# Altium PCB LHR Encoder Board.PcbDoc
Units mil, origin at the board's own origin, x right, y up, seen from the top; angles counter-clockwise.
Board outline 2000 x 2000 mil, 2 copper layers (Top Layer, Bottom Layer), stack 62.205 mil thick; 11 components, 14 nets, 54 pads, 7 vias.
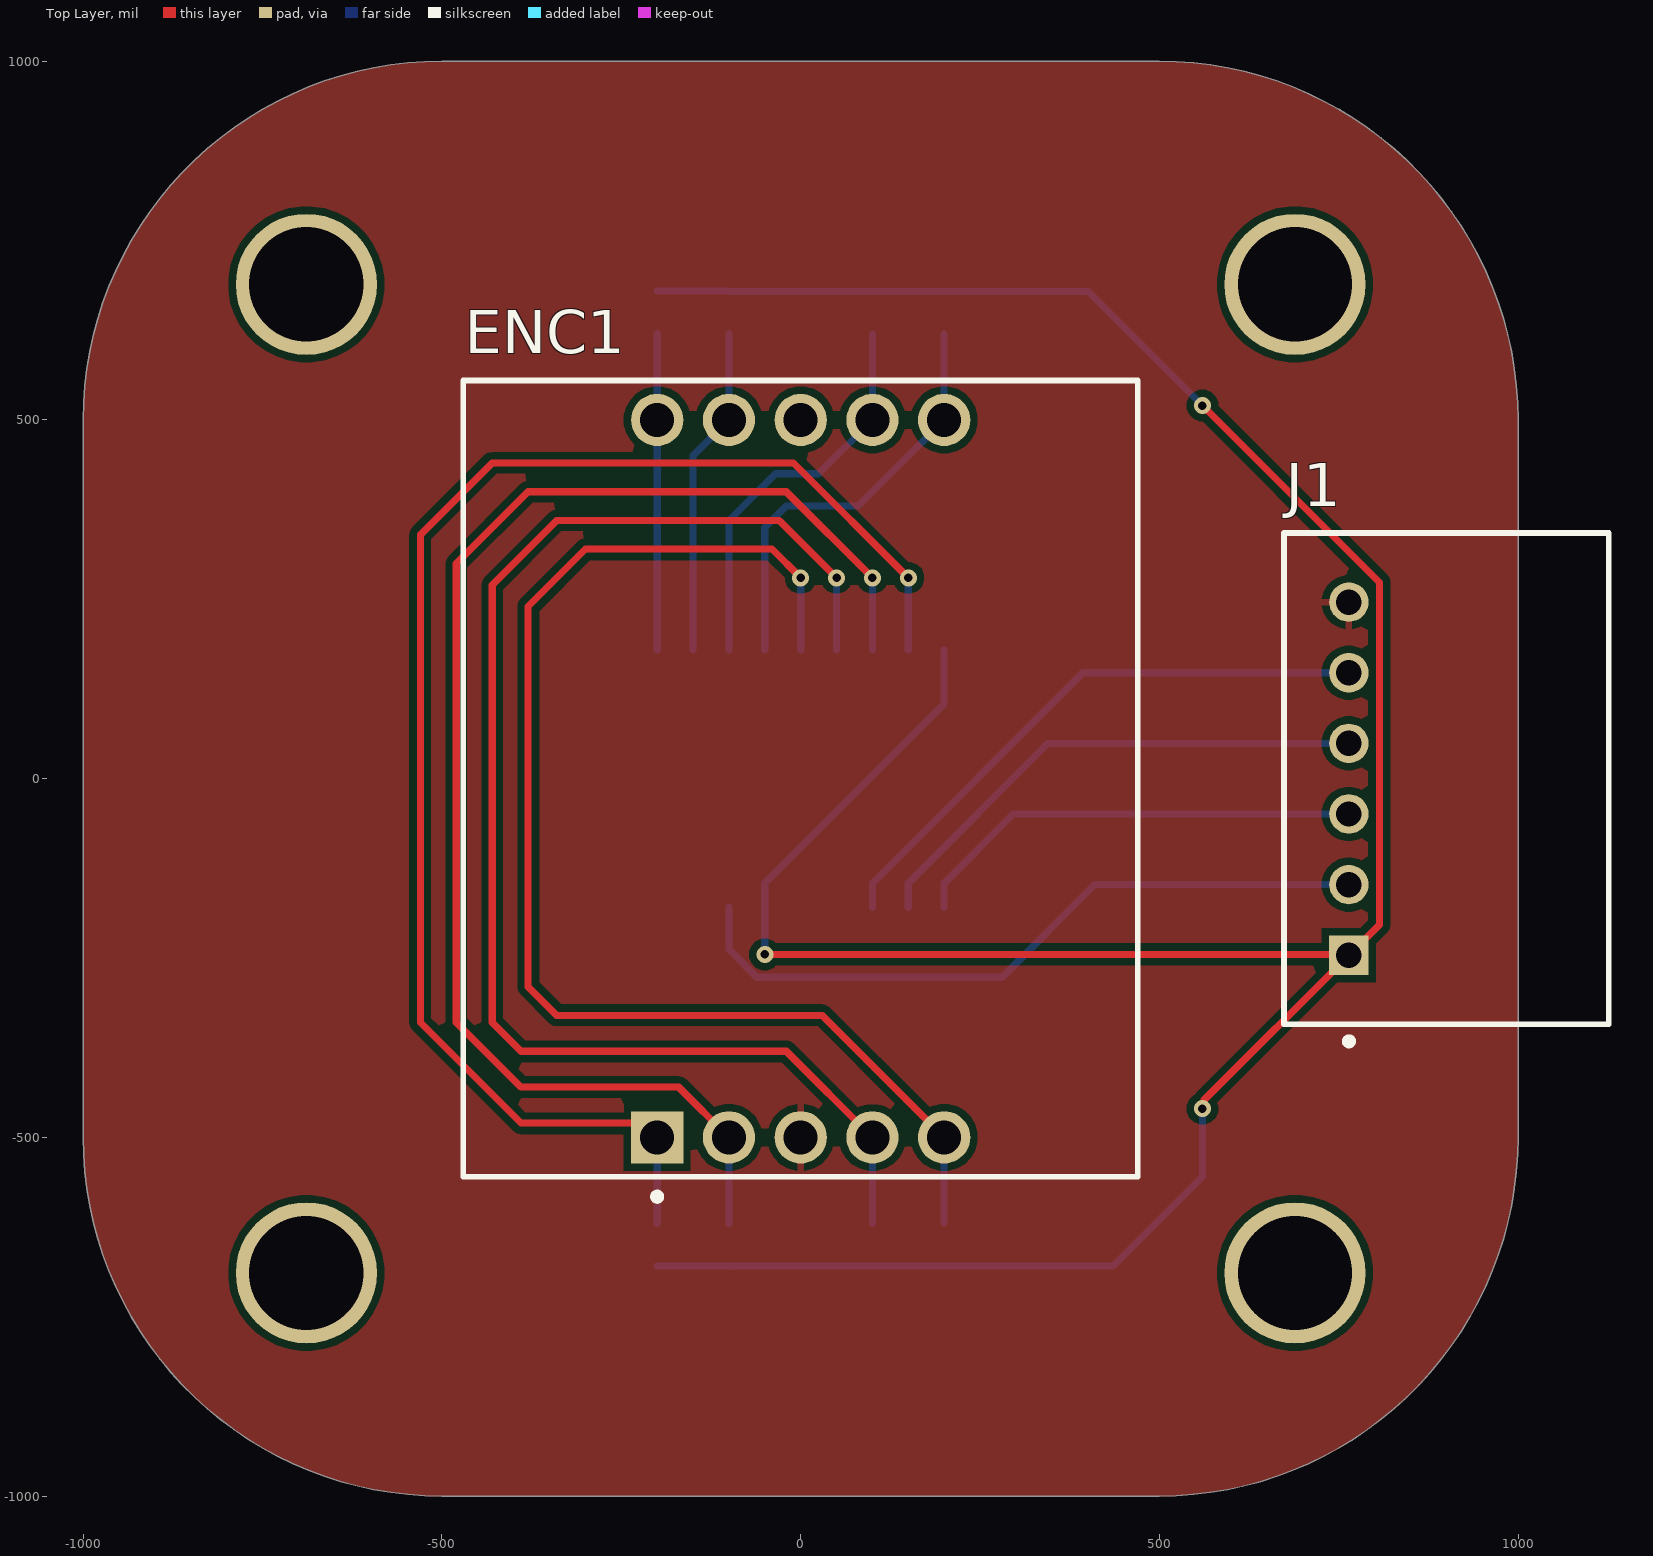
[diagram p0: Top Layer view]
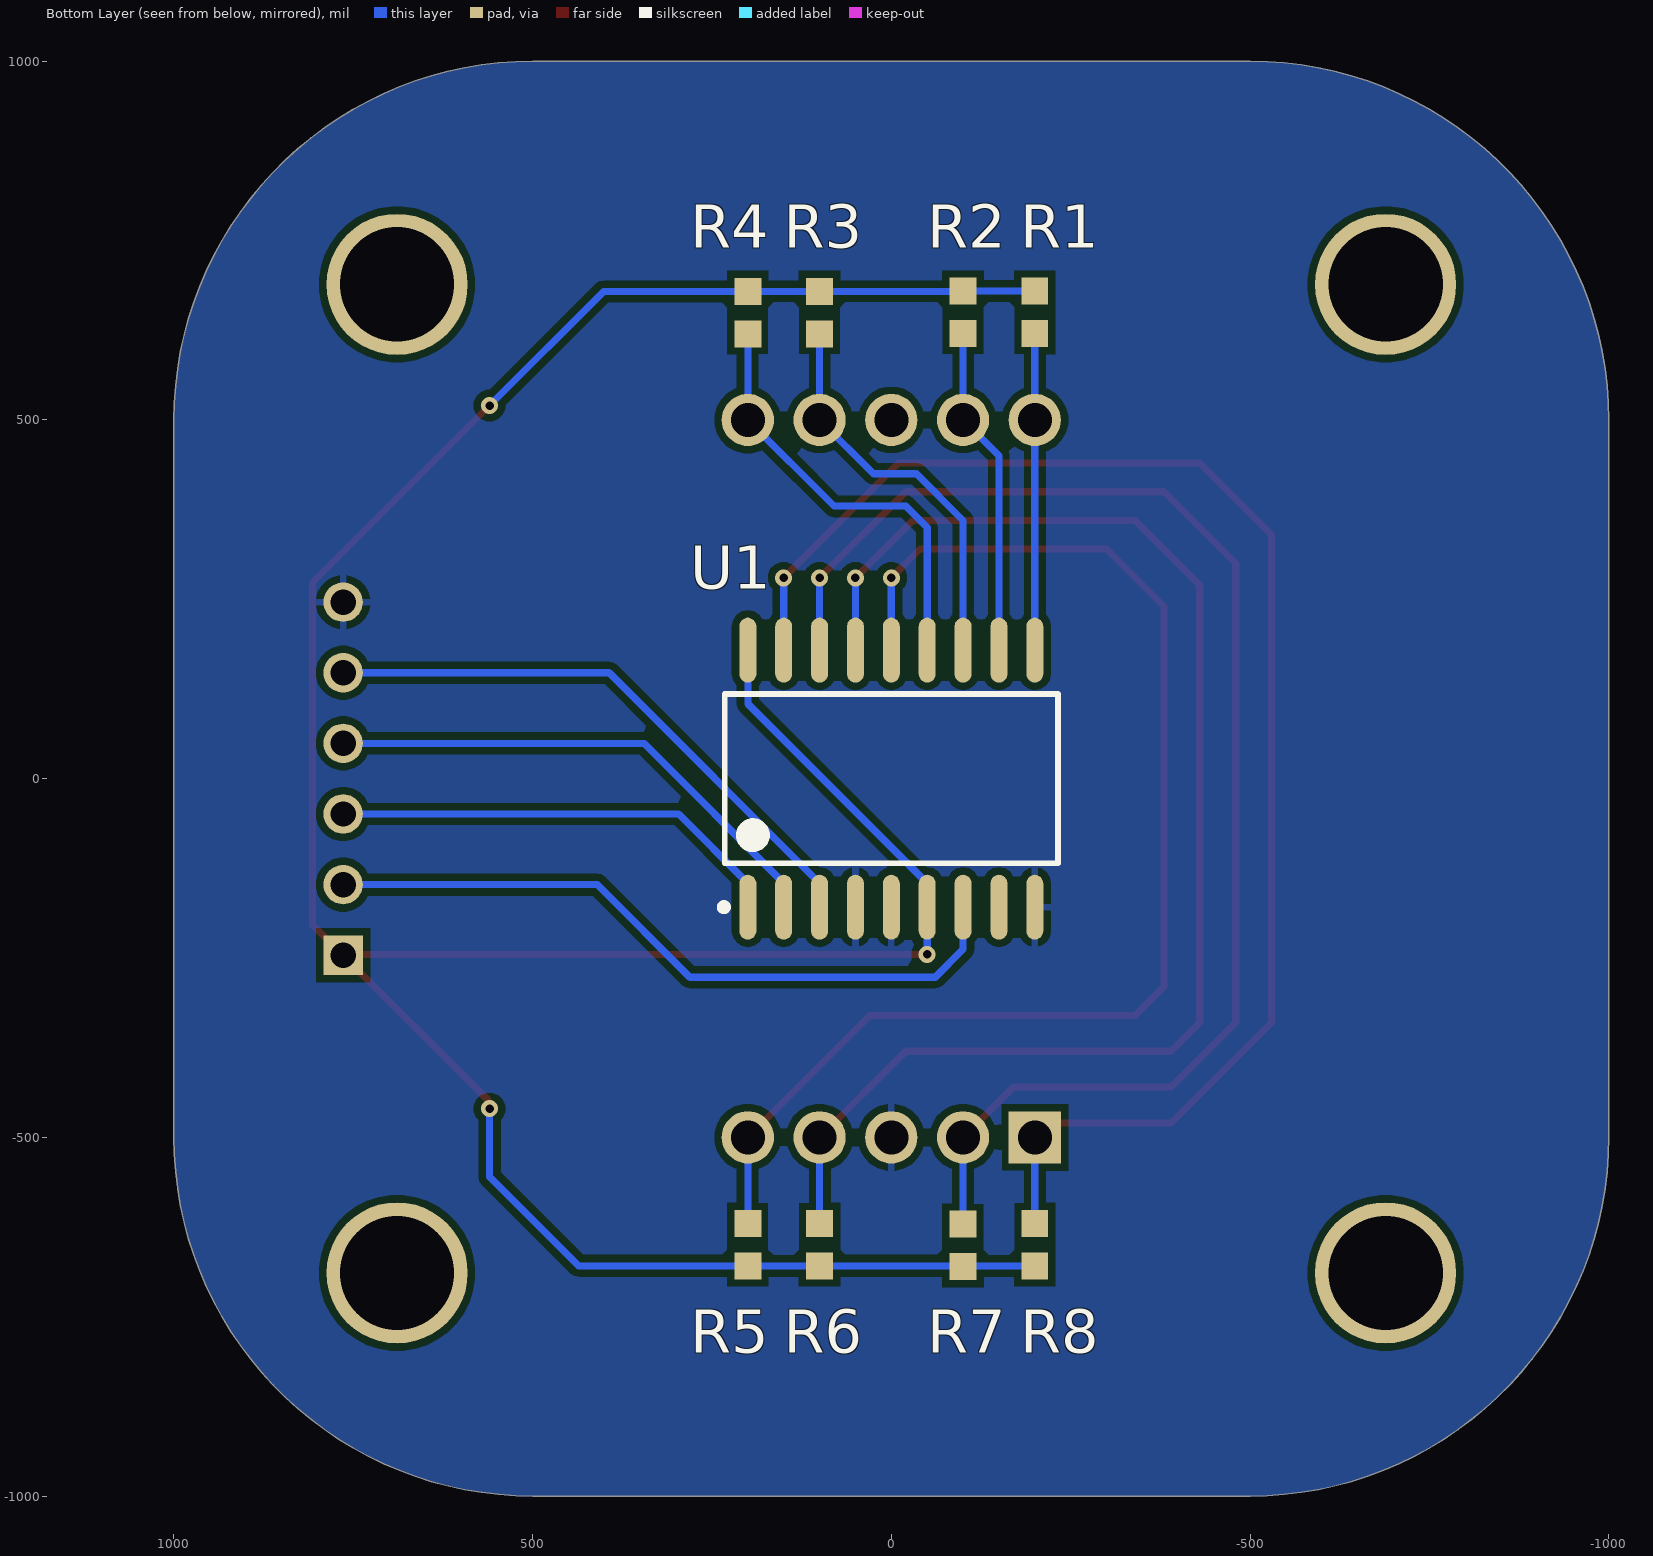
[diagram p1: Bottom Layer view, seen from below]
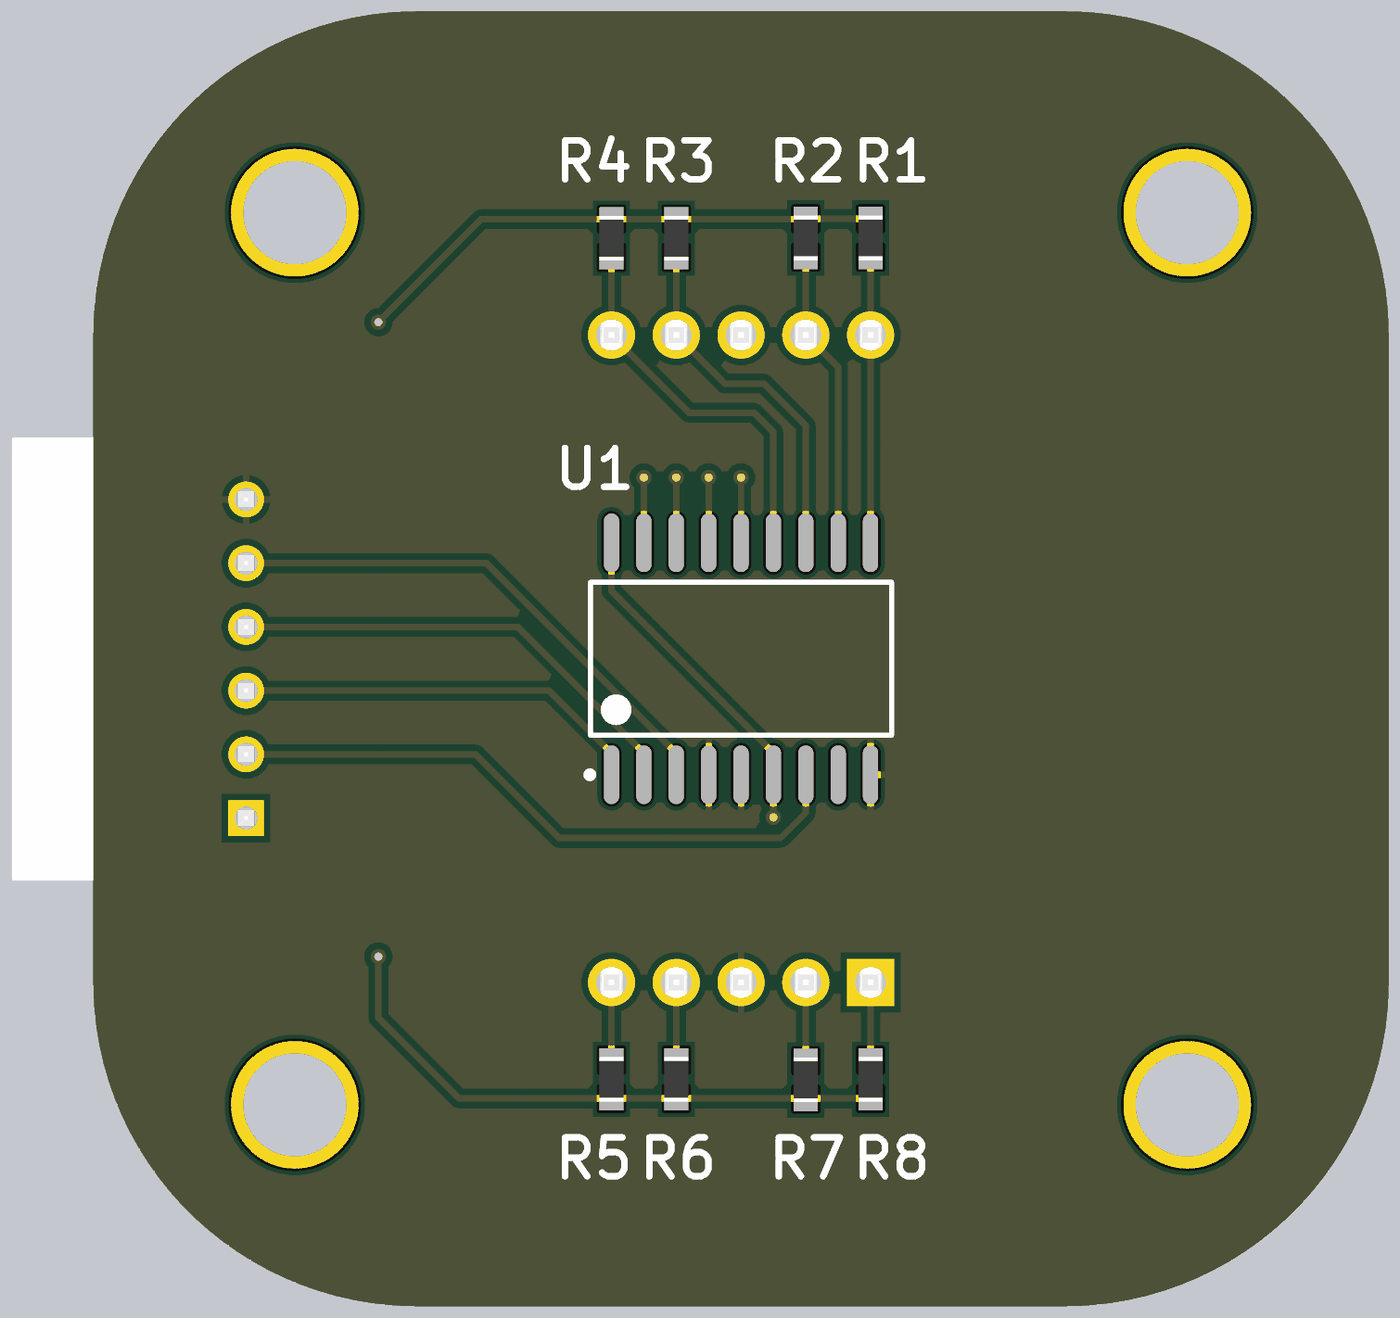
[diagram p2: 3D render of the assembled board from below, using the file's embedded part models]

## Layer stack, top to bottom
Top Solder: solder mask 0.4, Solder Resist, Dk 3.5
Top Layer: signal copper 1.378
Dielectric 1: dielectric 59.4488, FR-4, Dk 4.8
Bottom Layer: signal copper 1.378
Bottom Solder: solder mask 0.4, Solder Resist, Dk 3.5

## Board outline
-1000,-500 -1000,500 cw(c-500,500) -500,1000 500,1000 cw(c500,500) 1000,500 1000,-500 cw(c500,-500) 500,-1000 -500,-1000 cw(c-500,-500)

## Design rules (kind name [scope] priority, off if disabled: settings)
Clearance [All] p1: gap=10 ignorepadtopadclearanceinfootprint=FALSE
HoleSize [All] p1: absolutevalues=TRUE maxlimit=200 minlimit=1 maxpercent=80.000 minpercent=20.000
PolygonConnect [All] p1: connectstyle=Relief reliefconductorwidth=10 reliefentries=4 polygonreliefangle="90 Angle" airgapwidth=10
RoutingVias [All] p1: holewidth=28 width=50 viastyle="Through Hole" minholewidth=28 minwidth=50 maxholewidth=28 maxwidth=50
SolderMaskExpansion [All] p1: expansion=4 istentingtop=FALSE
SupplyNets "Schematic Supply Nets_1" [InNet('VDD')] p1: voltage=0.000
SupplyNets "Schematic Supply Nets" [InNet('GND')] p2: voltage=0.000
Width [All] p1: maxlimit=10 minlimit=10 preferedwidth=10
29 further rules are at their usual default settings.

## Components (designator, comment, footprint, x,y, rotation, side; value= is the part's Value field where it differs from the comment)
ENC1 "EAW0J-B24-AE0128L" FP-EAW0J-B24-AE0128L-MFG 0,0 r0 top
J1 "S6B-XH-A (LF)(SN)" FP-S6B-XH-A_LF_SN-MFG 900,0 r270 top
R1 "4.7k" RESC1608X55X30NL15T15 -200,650 r90 bottom
R2 "4.7k" RESC1608X55X30NL15T15 -100,650 r90 bottom
R3 "4.7k" RESC1608X55X30NL15T15 100,649.53 r90 bottom
R4 "4.7k" RESC1608X55X30NL15T15 200,649.53 r90 bottom
R5 "4.7k" RESC1608X55X30NL15T15 200,-649.53 r270 bottom
R6 "4.7k" RESC1608X55X30NL15T15 100,-649.53 r270 bottom
R7 "4.7k" RESC1608X55X30NL15T15 -100,-650.47 r270 bottom
R8 "4.7k" RESC1608X55X30NL15T15 -200,-649.53 r270 bottom
U1 "MCP23S08-E/SO" SOIC-SO18_N 0,0 r90 bottom

## Footprints (in the part's own frame and the unit in brackets; to place one, negate y for a bottom-side part, rotate by r counter-clockwise, add the part's x,y. Pads: shape width x height; smd on the part's side, far side on the other; paste and mask are expansions set on the pad)
FP-EAW0J-B24-AE0128L-MFG [mm]
  rect 1.85x1.85 hole 1.2 paste-2539.97 mask+0: 1(-5.08,-12.7)
  round 1.85 hole 1.2 paste-2539.97 mask+0: 2(-2.54,-12.7) 3(2.54,-12.7) 4(5.08,-12.7) 5(5.08,12.7) 6(2.54,12.7) 7(-2.54,12.7) 8(-5.08,12.7) 9(0,-12.7) 10(0,12.7)
  silkscreen extent -11.94,-14.92 11.94,14.1, body extent -12.04,-14.2 12.04,14.2, height 0.25
FP-S6B-XH-A_LF_SN-MFG [mm]
  rect 1.4x1.4 hole 0.9 paste-2539.97 mask+0: 1(6.25,-3.45)
  round 1.4 hole 0.9 paste-2539.97 mask+0: 2(3.75,-3.45) 3(1.25,-3.45) 4(-1.25,-3.45) 5(-3.75,-3.45) 6(-6.25,-3.45)
  silkscreen extent -8.7,-5.75 9.42,5.75, body extent -8.8,-5.85 8.8,5.85, height 0.25
RESC1608X55X30NL15T15 [mm] "Chip Resistor, 2-Leads, Body 1.75x0.95mm, IPC Medium Density"
  rect 0.95x0.95 smd: 1(-0.75,0) 2(0.75,0)
  body extent -0.87,-0.48 0.87,0.48, height 0.55
SOIC-SO18_N [mm] "SOIC, 18-Leads, Body 11.6x7.5mm, Pitch 1.27mm, IPC Medium Density"
  oval 2.3x0.6 smd: 1(-4.55,5.08) 2(-4.55,3.81) 3(-4.55,2.54) 4(-4.55,1.27) 5(-4.55,0) 6(-4.55,-1.27) 7(-4.55,-2.54) 8(-4.55,-3.81) 9(-4.55,-5.08) 10(4.55,-5.08) 11(4.55,-3.81) 12(4.55,-2.54) 13(4.55,-1.27) 14(4.55,0) 15(4.55,1.27) 16(4.55,2.54) 17(4.55,3.81) 18(4.55,5.08)
  silkscreen extent -4.67,-5.9 3,6.06, body extent -3.8,-5.87 3.8,5.87, height 2.65

## Part data
ENC1: library part CMP-07421-000029-1, "ROTARY ENCODER MECHANICAL 128PPR", Contact Current Rating=10mA, Insulation Resistance=1GR, Max Operating Temperature=85°C, Min Operating Temperature=-40°C, Nominal Supply Voltage (DC)=10V, Package Quantity=45, Built in Switch=No, Depth=27.94mm, Detent=No, Encoder Type=Mechanical, Height=27.56mm, Hole Diameter=9mm, Length=23.88mm, Mechanical Life=50000Cycles, Mount="Through Hole", Number of Channels=8, Number of Pins=128, Orientation=Vertical, Output Type=Binary, Packaging=Tray, Primary Type=ENCODER, Pulses per Revolution=128, Radiation Hardening=No, REACH SVHC="No SVHC", Resolution=8b, Series=ACE™, Termination="PC Pins", Type=Mechanical, Weight=0.5oz
J1: library part CMP-17439-000165-2, "CONN HEADER R/A 6POS 2.5MM", Color=Natural, Contact Resistance=20mR, Current Rating=3A, Flammability Rating="UL94 V-0", Housing Color=White, Insulation Resistance=1GR, Max Operating Temperature=85°C, Max Voltage Rating (AC)=250V, Min Operating Temperature=-25°C, Package Quantity=500, Connector Type=Header, Contact Finish - Mating=TIN, Contact Material=Brass, Contact Plating=Tin, Contact Shape=Square, Contact Type="Male Pin", Depth=11.5mm, Fastening Type=Detent, Gender=Male, Housing Material=Polyamide, Insulation Color=Natural, Insulation Material=Nylon, Lead Free="Lead Free", Lead Pitch=2.5mm, Length=17.4mm, Max Current Rating=3A, Mount="Through Hole", Number of Contacts=6, Number of Positions=6, Number of Rows=1, Orientation="Right Angle", Packaging=Bulk, Pitch=2.5mm, REACH SVHC="No SVHC", Series=XH, Termination=Solder, Voltage Rating=250V, Voltage Rating (AC)=250V, Wire/Cable Gauge=22AWG
R1 R2 R3 R4 R5 R6 R7 R8: library part CMP-1012-00586-3, "Precision Thick Film Chip Resistor, 4.7 KOhm, +/- 1%, -55 to 155 degC, 0603 (1608 Metric), RoHS, Tape and Reel", Case Code (Imperial)=1206, Case Code (Metric)=3216, Case\Package=1205, Max Operating Temperature="125 degC", Min Operating Temperature="-55 degC", Package Quantity=1, Power Rating="250 mW", Tolerance=5%, Type (Resistor)="Thick Film", Voltage Rating="50 V", ComponentLink1Description="Manufacturer URL", ComponentLink1URL=http://www.panasonic.com/, ComponentLink2Description=Datasheet, ComponentLink2URL=http://industrial.panasonic.com/cdbs/www-data/pdf/RDA0000/AOA0000C86.pdf, DatasheetVersion=Apr-15, Elements=4, Height="0.024 inch", Length="0.126 inch", Mount="Surface Mount", PackageDescription="2-Pin Surface Mount Device, Body 1.6 x 0.85 mm", PackageReference=0603, Packaging="Tape and Reel", Pins=8, Radiation Hardening=No, REACH SVHC="No SVHC", Resistance=4.7k, RoHSCompliant=true, Width="0.063 inch"
U1: library part CMP-0186-00124-2, "8-Bit I/O Expander with Serial Interface, 18-Pin SOIC, Extended Temperature", Code_JEDEC=MS-013, ComponentLink1Description="Manufacturer URL", ComponentLink1URL=http://www.microchip.com/, ComponentLink2Description=Datasheet, ComponentLink2URL=http://ww1.microchip.com/downloads/en/DeviceDoc/21919e.pdf, ComponentLink3Description="Package Specification", ComponentLink3URL=http://www.microchip.com/stellent/groups/techpub_sg/documents/packagingspec/en012702.pdf, DatasheetVersion="revE, Aug-2007", PackageDescription="18-Lead Plastic Small Outline (SO) - Wide 7.50mm Body [SOIC]", PackageReference=SOIC-SO18, PackageVersion="revBB, Aug-2009", RevisionNote="URLs added. Sch pin type corrected."

## Free pads (board coordinates)
  round 196.85 hole 159.45: 6(688.98,688.98) 7(-688.98,688.98) 8(-688.98,-688.98) 9(688.98,-688.98)

## Via types
v1: diameter 23.62, hole 11.81, Top Layer to Bottom Layer, tented both sides, 7 vias

## Nets (pads, with @x,y where several pads share a name; then routed paths per layer and width w, separated by ;. In a path a pad name is that pad's centre, name@x,y a point inside that pad or via, vN(x,y) a via of type N, cw(c..) or ccw(c..) an arc to the next point about the centre after c; other vN are vias at no path point)
CS: J1.2 U1.7 | length 992.6
  Bottom Layer w10: U1.7 -100,-237.92 -61.11,-276.81 280.84,-276.81 410.02,-147.64 J1.2
GND: ENC1.9 J1.6 U1.4 U1.5 U1.9
"OUTPUT 1": ENC1.1 R8.1 U1.17 | length 2084.8
  Top Layer w10: ENC1.1 -220,-480 -390,-480 -530,-340 -530,340 -430,440 -10,440 v1(150,280)
  Bottom Layer w10: R8.1 ENC1.1 ; U1.17 v1(150,280)
"OUTPUT 2": ENC1.2 R7.1 U1.16 | length 1979.2
  Top Layer w10: ENC1.2 -170,-430 -390,-430 -480,-340 -480,300 -380,400 -20,400 v1(100,280)
  Bottom Layer w10: R7.1 ENC1.2 ; U1.16 v1(100,280)
"OUTPUT 3": ENC1.3 R6.1 U1.15 | length 1977.6
  Top Layer w10: v1(50,280) -30,360 -340,360 -430,270 -430,-340 -390,-380 -20,-380 ENC1.3
  Bottom Layer w10: U1.15 v1(50,280) ; R6.1 ENC1.3
"OUTPUT 4": ENC1.4 R5.1 U1.14 | length 1847.6
  Top Layer w10: v1(0,280) -40,320 -300,320 -380,240 -380,-290 -340,-330 30,-330 ENC1.4
  Bottom Layer w10: U1.14 v1(0,280) ; R5.1 ENC1.4
"OUTPUT 5": ENC1.5 R4.1 U1.13 | length 610.2
  Top Layer w10: ENC1.5@194.9,494.9 ENC1.5
  Bottom Layer w10: U1.13 -50,350 -20,380 80,380 ENC1.5 R4.1
"OUTPUT 6": ENC1.6 R3.1 U1.12 | length 558.9
  Bottom Layer w10: U1.12 -100,360 -35,425 25,425 ENC1.6 R3.1
"OUTPUT 7": ENC1.7 R2.1 U1.11 | length 462
  Bottom Layer w10: U1.11 -150,450 ENC1.7 R2.1
"OUTPUT 8": ENC1.8 R1.1 U1.10 | length 441.3
  Bottom Layer w10: U1.10 ENC1.8 R1.1
SCK: J1.3 U1.1 | length 637.6
  Bottom Layer w10: U1.1 200,-145.67 296.46,-49.21 J1.3
SI: J1.4 U1.2 | length 728.4
  Bottom Layer w10: U1.2 150,-145.67 344.88,49.21 J1.4
SO: J1.5 U1.3 | length 819.1
  Bottom Layer w10: U1.3 100,-145.67 393.31,147.64 J1.5
VDD: J1.1 R1.2 R2.2 R3.2 R4.2 R5.2 R6.2 R7.2 R8.2 U1.6 U1.18 | length 4259.9
  Top Layer w10: v1(-50,-245) 763.11,-245 J1.1 ; v1(560,-460) 562.61,-457.39 562.61,-447.63 J1.1 ; v1(560,520) 806.73,273.27 806.73,-203.5 J1.1
  Bottom Layer w10: R8.2 -100.94,-679.06 R7.2 -99.06,-679.06 R6.2 435.94,-679.06 560,-555 v1(560,-460) ; R1.2 R2.2 -99.53,679.06 R3.2 R4.2 400.94,679.06 v1(560,520) ; v1(-50,-245) -50,-145.67 200,104.33 U1.18
pads on no net: ENC1.10 U1.8

## Polygon pours and split planes (outlines as drawn)
GND on Top Layer "GND_L01_P000" (solid, pour order 0): -1000,-500 -1000,500 cw(c-500,500) -500,1000 500,1000 cw(c500,500) 1000,500 1000,-500 cw(c500,-500) 500,-1000 -500,-1000 cw(c-500,-500)
GND on Bottom Layer "GND_L02_P001" (solid, pour order 1): -1000,-500 -1000,500 cw(c-500,500) -500,1000 500,1000 cw(c500,500) 1000,500 1000,-500 cw(c500,-500) 500,-1000 -500,-1000 cw(c-500,-500)

## Silkscreen, mask and mechanical layers (free items; w line width, h text height)
Mechanical 1:
  the board outline again, w10